# EAGLE board SideShield (EAGLE 5.11)
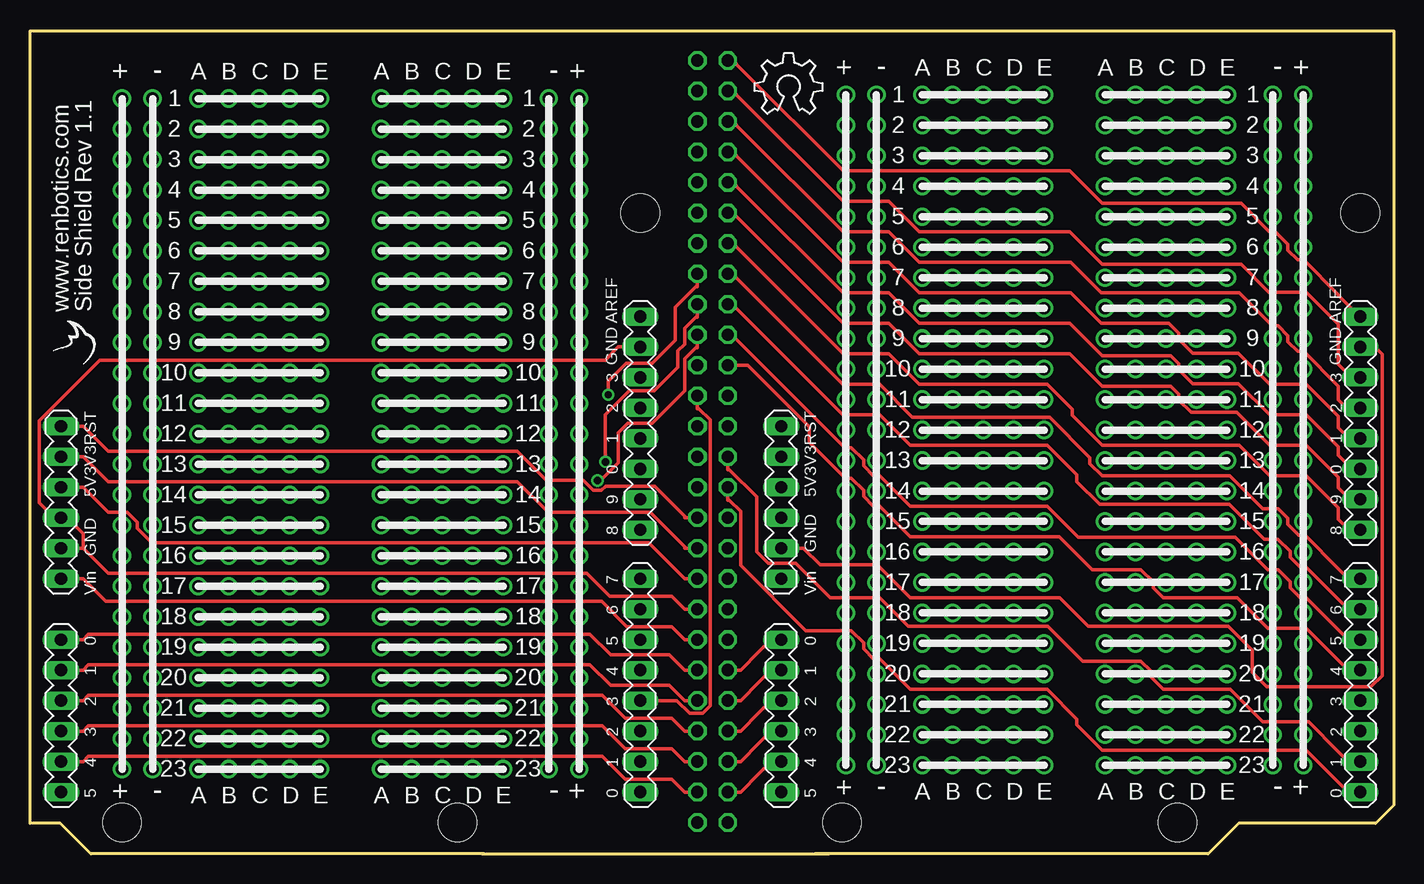
[diagram p0: board, top side]
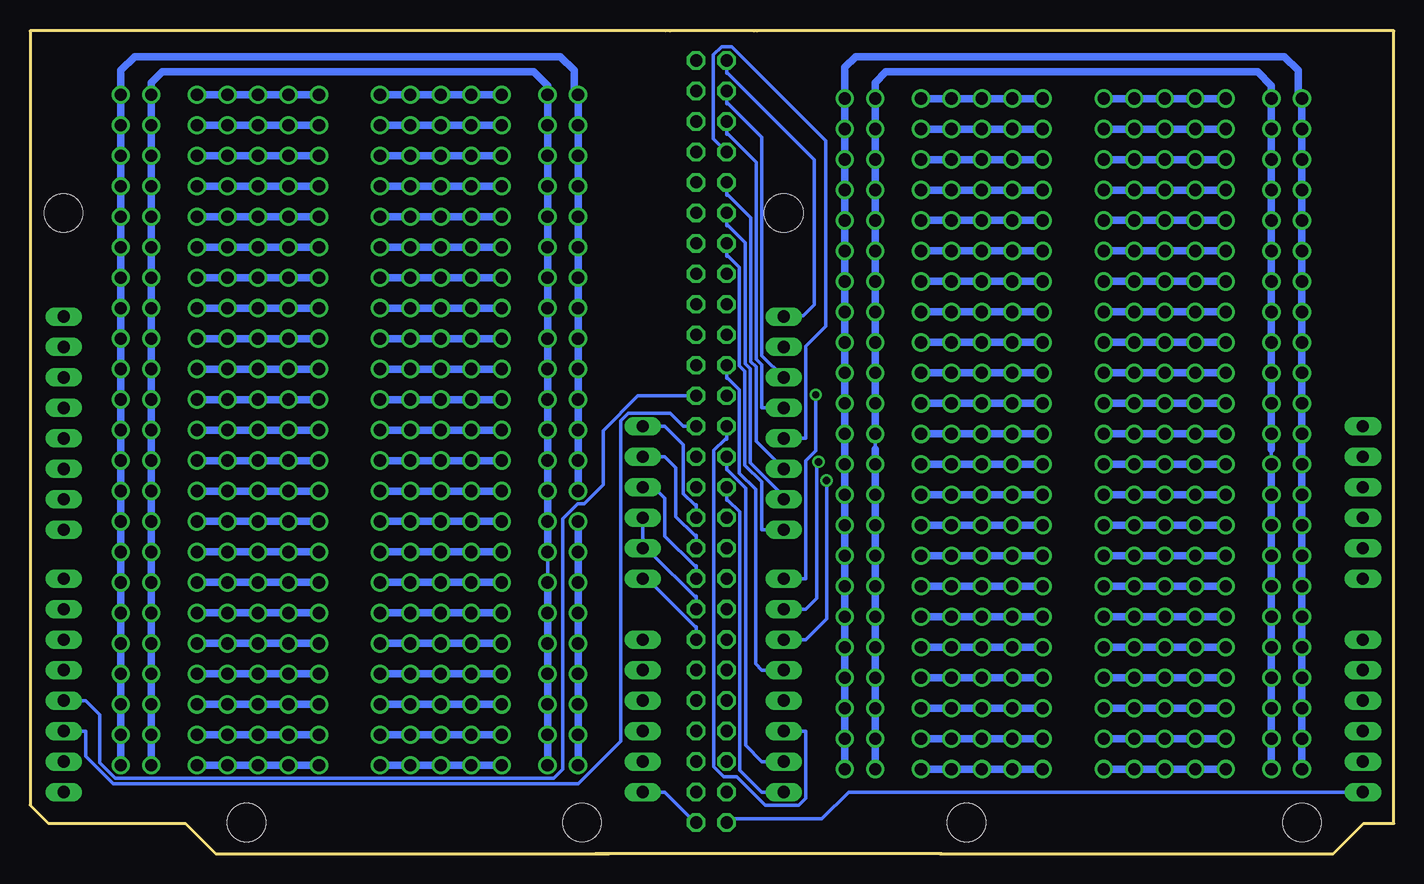
[diagram p1: board, bottom side, seen from below]

Size 113.66 x 68.66 mm. Coordinates in mm from the lower left corner, seen from the top.
Outline: 47.03,68.66 0.05,68.66
Outline: 37.85,0 37.67,0
Outline: 37.67,0 5.08,0 2.54,2.54 0,2.54 0,68.58 53.07,68.58
Outline: 53.07,68.58 53.34,68.58
Outline: 107.36,68.66 60.69,68.58
Outline: 60.69,68.58 60.38,68.66
Outline: 66.57,0 98.17,0 100.71,2.54 112.14,2.54 113.67,4.06 113.67,68.58 60.69,68.58
Outline: 66.57,0 65.41,0
Outline: 60.33,68.58 60.69,68.58
Outline: 37.67,0 66.57,0
Outline: 53.07,68.58 60.69,68.58
Copper layers (1*16): Top 0.035mm / dielectric 1.5mm / Bottom 0.035mm
Design rules "default *": minimum track width 10mil, minimum drill 24mil, track to track 10mil, track to pad 10mil, pad to pad 10mil, via to via 10mil, smd to smd 10mil, copper to edge 40mil, drill to drill 10mil, minimum pad ring 10mil, minimum via ring 8mil, stop-mask expansion 4mil, vias tented up to drill 0mil, thermal gap 10mil
Net classes: 0 default: width 0.254 mm, drill 0.305 mm, clearance 0.152 mm; 1 power: width 0.61 mm, drill 0.508 mm, clearance 0.152 mm
Holes 3.2 mm at 7.67,2.62 35.61,2.62 67.68,2.62 95.62,2.62 110.86,53.42 50.85,53.42

## Footprints (pad centres in the part's own frame; a part is rotated, then mirrored left to right if it is on the bottom)
MA06-1 = drill 1.016 long: 1 -6.35,0; 2 -3.81,0; 3 -1.27,0; 4 1.27,0; 5 3.81,0; 6 6.35,0
MA06-2 = drill 1.016 octagon: 1 -6.35,-1.27; 2 -6.35,1.27; 3 -3.81,-1.27; 4 -3.81,1.27; 5 -1.27,-1.27; 6 -1.27,1.27; 7 1.27,-1.27; 8 1.27,1.27; 9 3.81,-1.27; 10 3.81,1.27; 11 6.35,-1.27; 12 6.35,1.27
MA08-1 = drill 1.016 long: 1 -8.89,0; 2 -6.35,0; 3 -3.81,0; 4 -1.27,0; 5 1.27,0; 6 3.81,0; 7 6.35,0; 8 8.89,0
MA07-2 = drill 1.016 octagon: 1 -7.62,-1.27; 2 -7.62,1.27; 3 -5.08,-1.27; 4 -5.08,1.27; 5 -2.54,-1.27; 6 -2.54,1.27; 7 0,-1.27; 8 0,1.27; 9 2.54,-1.27; 10 2.54,1.27; 11 5.08,-1.27; 12 5.08,1.27; 13 7.62,-1.27; 14 7.62,1.27
MA08-2 = drill 1.016 octagon: 1 -8.89,-1.27; 2 -8.89,1.27; 3 -6.35,-1.27; 4 -6.35,1.27; 5 -3.81,-1.27; 6 -3.81,1.27; 7 -1.27,-1.27; 8 -1.27,1.27; 9 1.27,-1.27; 10 1.27,1.27; 11 3.81,-1.27; 12 3.81,1.27; 13 6.35,-1.27; 14 6.35,1.27; 15 8.89,-1.27; 16 8.89,1.27
MA09-1 = drill 1.016 round: 1 -10.16,0; 2 -7.62,0; 3 -5.08,0; 4 -2.54,0; 5 0,0; 6 2.54,0; 7 5.08,0; 8 7.62,0; 9 10.16,0
MA05-1 = drill 1.016 round: 1 -5.08,0; 2 -2.54,0; 3 0,0; 4 2.54,0; 5 5.08,0
MA05-2 = drill 1.016 octagon: 1 -5.08,-1.27; 2 -5.08,1.27; 3 -2.54,-1.27; 4 -2.54,1.27; 5 0,-1.27; 6 0,1.27; 7 2.54,-1.27; 8 2.54,1.27; 9 5.08,-1.27; 10 5.08,1.27

## Placement (x,y rotation side)
ANALOG1  [MA06-1]  2.59,11.51 270 top
ANALOG2  [MA06-1]  62.6,11.51 270 top
ANALOGJMP  [MA06-2]  56.88,8.97 270 top
DIGITALHIGH1  [MA08-1]  50.85,35.89 270 top
DIGITALHIGH2  [MA08-1]  110.86,14.05 270 top
DIGITALHIGHJMP  [MA07-2]  56.88,58.5 270 top
DIGITALLOW1  [MA08-1]  50.85,14.05 270 top
DIGITALLOW2  [MA08-1]  110.86,35.89 270 top
DIGITALLOWJMP  [MA08-2]  56.88,39.45 270 top
E$1  [OSHW_6X200_NOTEXT]  60.38,61.67 0 top
E$2  [LOGO]  5.45,40.72 90 top
J1  [MA09-1]  14.02,52.78 90 top
J2  [MA09-1]  16.56,52.78 90 top
J3  [MA09-1]  19.1,52.78 90 top
J4  [MA09-1]  21.64,52.78 90 top
J5  [MA09-1]  24.18,52.78 90 top
J6  [MA09-1]  29.26,52.78 90 top
J7  [MA09-1]  45.77,52.78 90 top
J8  [MA09-1]  7.67,52.78 90 top
J9  [MA09-1]  31.8,52.78 90 top
J10  [MA09-1]  34.34,52.78 90 top
J11  [MA09-1]  36.88,52.78 90 top
J12  [MA09-1]  39.42,52.78 90 top
J13  [MA09-1]  43.23,52.78 90 top
J14  [MA09-1]  10.21,52.78 90 top
J15  [MA09-1]  99.75,17.54 270 top
J16  [MA05-1]  99.75,35.32 270 top
J17  [MA09-1]  97.21,17.54 270 top
J18  [MA05-1]  97.21,35.32 270 top
J19  [MA09-1]  94.67,17.54 270 top
J20  [MA09-1]  39.42,17.22 270 top
J21  [MA09-1]  36.88,17.22 270 top
J22  [MA09-1]  34.34,17.22 270 top
J23  [MA09-1]  31.8,17.22 270 top
J24  [MA09-1]  29.26,17.22 270 top
J25  [MA09-1]  43.23,17.22 270 top
J26  [MA09-1]  10.21,17.22 270 top
J27  [MA05-1]  39.42,35 270 top
J28  [MA05-1]  36.88,35 270 top
J29  [MA05-1]  34.34,35 270 top
J30  [MA05-1]  31.8,35 270 top
J31  [MA05-1]  29.26,35 270 top
J32  [MA05-1]  43.23,35 270 top
J33  [MA05-1]  10.21,35 270 top
J34  [MA09-1]  24.18,17.22 270 top
J35  [MA09-1]  21.64,17.22 270 top
J36  [MA09-1]  19.1,17.22 270 top
J37  [MA09-1]  16.56,17.22 270 top
J38  [MA09-1]  14.02,17.22 270 top
J39  [MA09-1]  45.77,17.22 270 top
J40  [MA09-1]  7.67,17.22 270 top
J41  [MA05-1]  21.64,35 270 top
J42  [MA05-1]  24.18,35 270 top
J43  [MA05-1]  19.1,35 270 top
J44  [MA05-1]  16.56,35 270 top
J45  [MA05-1]  14.02,35 270 top
J46  [MA05-1]  45.77,35 270 top
J47  [MA05-1]  7.67,35 270 top
J48  [MA05-1]  94.67,35.32 270 top
J49  [MA09-1]  92.13,17.54 270 top
J50  [MA05-1]  92.13,35.32 270 top
J51  [MA09-1]  89.59,17.54 270 top
J52  [MA05-1]  89.59,35.32 270 top
J53  [MA09-1]  84.51,17.54 270 top
J54  [MA05-1]  81.97,35.32 270 top
J55  [MA09-1]  81.97,17.54 270 top
J56  [MA05-1]  84.51,35.32 270 top
J57  [MA09-1]  79.43,17.54 270 top
J58  [MA05-1]  79.43,35.32 270 top
J59  [MA09-1]  76.89,17.54 270 top
J60  [MA05-1]  76.89,35.32 270 top
J61  [MA09-1]  74.35,17.54 270 top
J62  [MA05-1]  74.35,35.32 270 top
J63  [MA09-1]  70.54,17.54 270 top
J64  [MA05-1]  70.54,35.32 270 top
J65  [MA09-1]  68,17.54 270 top
J66  [MA05-1]  68,35.32 270 top
J67  [MA09-1]  103.56,17.54 270 top
J68  [MA05-1]  103.56,35.32 270 top
J69  [MA09-1]  106.1,17.54 270 top
J70  [MA05-1]  106.1,35.32 270 top
J71  [MA09-1]  74.35,53.1 90 top
J72  [MA09-1]  76.89,53.1 90 top
J73  [MA09-1]  79.43,53.1 90 top
J74  [MA09-1]  81.97,53.1 90 top
J75  [MA09-1]  84.51,53.1 90 top
J76  [MA09-1]  106.1,53.1 90 top
J77  [MA09-1]  68,53.1 90 top
J78  [MA09-1]  89.59,53.1 90 top
J79  [MA09-1]  92.13,53.1 90 top
J80  [MA09-1]  94.67,53.1 90 top
J81  [MA09-1]  97.21,53.1 90 top
J82  [MA09-1]  99.75,53.1 90 top
J83  [MA09-1]  103.56,53.1 90 top
J84  [MA09-1]  70.54,53.1 90 top
POWER1  [MA06-1]  2.59,29.29 270 top
POWER2  [MA06-1]  62.6,29.29 270 top
POWERJMP  [MA05-2]  56.88,22.94 270 top

## Library data of the parts
ANALOG1 ANALOG2 ANALOGJMP DIGITALHIGH1 DIGITALHIGH2 DIGITALHIGHJMP DIGITALLOW1 DIGITALLOW2 DIGITALLOWJMP J1-J84 POWER1 POWER2 POWERJMP = con-lstb
E$1 = Logo 2
E$2 = renbotics

## Nets
3V31: POWER1.2 POWERJMP.3
3V32: POWER2.2 POWERJMP.4
AN10: ANALOG1.6 ANALOGJMP.11
AN11: ANALOG1.5 ANALOGJMP.9
AN12: ANALOG1.4 ANALOGJMP.7
AN13: ANALOG1.3 ANALOGJMP.5
AN14: ANALOG1.2 ANALOGJMP.3
AN15: ANALOG1.1 ANALOGJMP.1
AN20: ANALOG2.6 ANALOGJMP.12
AN21: ANALOG2.5 ANALOGJMP.10
AN22: ANALOG2.4 ANALOGJMP.8
AN23: ANALOG2.3 ANALOGJMP.6
AN24: ANALOG2.2 ANALOGJMP.4
AN25: ANALOG2.1 ANALOGJMP.2
AREF1: DIGITALHIGH1.1 DIGITALHIGHJMP.1
AREF2: DIGITALHIGHJMP.2 DIGITALLOW2.1
DL10: DIGITALLOW1.8 DIGITALLOWJMP.15
DL11: DIGITALLOW1.7 DIGITALLOWJMP.13
DL12: DIGITALLOW1.6 DIGITALLOWJMP.11
DL13: DIGITALLOW1.5 DIGITALLOWJMP.9
DL14: DIGITALLOW1.4 DIGITALLOWJMP.7
DL15: DIGITALLOW1.3 DIGITALLOWJMP.5
DL16: DIGITALLOW1.2 DIGITALLOWJMP.3
DL17: DIGITALLOW1.1 DIGITALLOWJMP.1
DL18: DIGITALHIGH1.8 DIGITALHIGHJMP.13
DL19: DIGITALHIGH1.7 DIGITALHIGHJMP.11
DL20: DIGITALHIGH2.8 DIGITALLOWJMP.16
DL21: DIGITALHIGH2.7 DIGITALLOWJMP.14
DL22: DIGITALHIGH2.6 DIGITALLOWJMP.12
DL23: DIGITALHIGH2.5 DIGITALLOWJMP.10
DL24: DIGITALHIGH2.4 DIGITALLOWJMP.8
DL25: DIGITALHIGH2.3 DIGITALLOWJMP.6
DL26: DIGITALHIGH2.2 DIGITALLOWJMP.4
DL27: DIGITALHIGH2.1 DIGITALLOWJMP.2
DL28: DIGITALHIGHJMP.14 DIGITALLOW2.8
DL29: DIGITALHIGHJMP.12 DIGITALLOW2.7
DL110: DIGITALHIGH1.6 DIGITALHIGHJMP.9
DL111: DIGITALHIGH1.5 DIGITALHIGHJMP.7
DL112: DIGITALHIGH1.4 DIGITALHIGHJMP.5
DL113: DIGITALHIGH1.3 DIGITALHIGHJMP.3
DL210: DIGITALHIGHJMP.10 DIGITALLOW2.6
DL211: DIGITALHIGHJMP.8 DIGITALLOW2.5
DL212: DIGITALHIGHJMP.6 DIGITALLOW2.4
DL213: DIGITALHIGHJMP.4 DIGITALLOW2.3
GND: J13.1 J13.2 J13.3 J13.4 J13.5 J13.6 J13.7 J13.8 J13.9 J14.1 J14.2 J14.3 J14.4 J14.5 J14.6 J14.7 J14.8 J14.9 J25.1 J25.2 J25.3 J25.4 J25.5 J25.6 J25.7 J25.8 J25.9 J26.1 J26.2 J26.3 J26.4 J26.5 J26.6 J26.7 J26.8 J26.9 J32.1 J32.2 J32.3 J32.4 J32.5 J33.1 J33.2 J33.3 J33.4 J33.5
GND1: DIGITALHIGH1.2 POWER1.4 POWER1.5 POWERJMP.7
GND2: DIGITALLOW2.2 POWER2.4 POWER2.5 POWERJMP.8
GND3: J63.1 J63.2 J63.3 J63.4 J63.5 J63.6 J63.7 J63.8 J63.9 J64.1 J64.2 J64.3 J64.4 J64.5 J67.1 J67.2 J67.3 J67.4 J67.5 J67.6 J67.7 J67.8 J67.9 J68.1 J68.2 J68.3 J68.4 J68.5 J83.1 J83.2 J83.3 J83.4 J83.5 J83.6 J83.7 J83.8 J83.9 J84.1 J84.2 J84.3 J84.4 J84.5 J84.6 J84.7 J84.8 J84.9
N$1: J20.1 J21.1 J22.1 J23.1 J24.1
N$2: J20.2 J21.2 J22.2 J23.2 J24.2
N$3: J20.3 J21.3 J22.3 J23.3 J24.3
N$4: J20.4 J21.4 J22.4 J23.4 J24.4
N$5: J20.5 J21.5 J22.5 J23.5 J24.5
N$6: J20.6 J21.6 J22.6 J23.6 J24.6
N$7: J20.7 J21.7 J22.7 J23.7 J24.7
N$8: J20.8 J21.8 J22.8 J23.8 J24.8
N$9: J20.9 J21.9 J22.9 J23.9 J24.9
N$10: J27.5 J28.5 J29.5 J30.5 J31.5
N$11: J27.4 J28.4 J29.4 J30.4 J31.4
N$12: J27.3 J28.3 J29.3 J30.3 J31.3
N$13: J27.2 J28.2 J29.2 J30.2 J31.2
N$14: J27.1 J28.1 J29.1 J30.1 J31.1
N$15: J15.1 J17.1 J19.1 J49.1 J51.1
N$16: J15.2 J17.2 J19.2 J49.2 J51.2
N$17: J1.1 J2.1 J3.1 J4.1 J5.1
N$18: J15.3 J17.3 J19.3 J49.3 J51.3
N$19: J34.9 J35.9 J36.9 J37.9 J38.9
N$20: J34.8 J35.8 J36.8 J37.8 J38.8
N$21: J34.7 J35.7 J36.7 J37.7 J38.7
N$22: J34.6 J35.6 J36.6 J37.6 J38.6
N$23: J34.5 J35.5 J36.5 J37.5 J38.5
N$24: J34.4 J35.4 J36.4 J37.4 J38.4
N$25: J34.3 J35.3 J36.3 J37.3 J38.3
N$26: J34.2 J35.2 J36.2 J37.2 J38.2
N$27: J34.1 J35.1 J36.1 J37.1 J38.1
N$28: J41.5 J42.5 J43.5 J44.5 J45.5
N$29: J41.4 J42.4 J43.4 J44.4 J45.4
N$30: J41.3 J42.3 J43.3 J44.3 J45.3
N$31: J41.2 J42.2 J43.2 J44.2 J45.2
N$32: J41.1 J42.1 J43.1 J44.1 J45.1
N$33: J15.4 J17.4 J19.4 J49.4 J51.4
N$34: J1.2 J2.2 J3.2 J4.2 J5.2
N$35: J1.3 J2.3 J3.3 J4.3 J5.3
N$36: J1.4 J2.4 J3.4 J4.4 J5.4
N$37: J1.5 J2.5 J3.5 J4.5 J5.5
N$38: J1.6 J2.6 J3.6 J4.6 J5.6
N$39: J1.7 J2.7 J3.7 J4.7 J5.7
N$40: J1.8 J2.8 J3.8 J4.8 J5.8
N$41: J1.9 J2.9 J3.9 J4.9 J5.9
N$42: J15.5 J17.5 J19.5 J49.5 J51.5
N$43: J6.1 J9.1 J10.1 J11.1 J12.1
N$44: J6.2 J9.2 J10.2 J11.2 J12.2
N$45: J6.3 J9.3 J10.3 J11.3 J12.3
N$46: J6.4 J9.4 J10.4 J11.4 J12.4
N$47: J6.5 J9.5 J10.5 J11.5 J12.5
N$48: J6.6 J9.6 J10.6 J11.6 J12.6
N$49: J6.7 J9.7 J10.7 J11.7 J12.7
N$50: J6.8 J9.8 J10.8 J11.8 J12.8
N$51: J6.9 J9.9 J10.9 J11.9 J12.9
N$52: J15.6 J17.6 J19.6 J49.6 J51.6
N$53: J15.7 J17.7 J19.7 J49.7 J51.7
N$54: J15.8 J17.8 J19.8 J49.8 J51.8
N$55: J15.9 J17.9 J19.9 J49.9 J51.9
N$56: J16.5 J18.5 J48.5 J50.5 J52.5
N$57: J16.4 J18.4 J48.4 J50.4 J52.4
N$58: J16.3 J18.3 J48.3 J50.3 J52.3
N$59: J16.2 J18.2 J48.2 J50.2 J52.2
N$60: J16.1 J18.1 J48.1 J50.1 J52.1
N$61: J53.9 J55.9 J57.9 J59.9 J61.9
N$62: J53.8 J55.8 J57.8 J59.8 J61.8
N$63: J53.7 J55.7 J57.7 J59.7 J61.7
N$64: J53.6 J55.6 J57.6 J59.6 J61.6
N$65: J53.5 J55.5 J57.5 J59.5 J61.5
N$66: J53.4 J55.4 J57.4 J59.4 J61.4
N$67: J53.3 J55.3 J57.3 J59.3 J61.3
N$68: J53.2 J55.2 J57.2 J59.2 J61.2
N$69: J53.1 J55.1 J57.1 J59.1 J61.1
N$70: J54.5 J56.5 J58.5 J60.5 J62.5
N$71: J54.4 J56.4 J58.4 J60.4 J62.4
N$72: J54.3 J56.3 J58.3 J60.3 J62.3
N$73: J54.2 J56.2 J58.2 J60.2 J62.2
N$74: J54.1 J56.1 J58.1 J60.1 J62.1
N$75: J71.1 J72.1 J73.1 J74.1 J75.1
N$76: J71.2 J72.2 J73.2 J74.2 J75.2
N$77: J71.3 J72.3 J73.3 J74.3 J75.3
N$78: J71.4 J72.4 J73.4 J74.4 J75.4
N$79: J71.5 J72.5 J73.5 J74.5 J75.5
N$80: J71.6 J72.6 J73.6 J74.6 J75.6
N$81: J71.7 J72.7 J73.7 J74.7 J75.7
N$82: J71.8 J72.8 J73.8 J74.8 J75.8
N$83: J71.9 J72.9 J73.9 J74.9 J75.9
N$84: J78.1 J79.1 J80.1 J81.1 J82.1
N$85: J78.2 J79.2 J80.2 J81.2 J82.2
N$86: J78.3 J79.3 J80.3 J81.3 J82.3
N$87: J78.4 J79.4 J80.4 J81.4 J82.4
N$88: J78.5 J79.5 J80.5 J81.5 J82.5
N$89: J78.6 J79.6 J80.6 J81.6 J82.6
N$90: J78.7 J79.7 J80.7 J81.7 J82.7
N$91: J78.8 J79.8 J80.8 J81.8 J82.8
N$92: J78.9 J79.9 J80.9 J81.9 J82.9
RST1: POWER1.1 POWERJMP.1
RST2: POWER2.1 POWERJMP.2
VCC: J7.1 J7.2 J7.3 J7.4 J7.5 J7.6 J7.7 J7.8 J7.9 J8.1 J8.2 J8.3 J8.4 J8.5 J8.6 J8.7 J8.8 J8.9 J39.1 J39.2 J39.3 J39.4 J39.5 J39.6 J39.7 J39.8 J39.9 J40.1 J40.2 J40.3 J40.4 J40.5 J40.6 J40.7 J40.8 J40.9 J46.1 J46.2 J46.3 J46.4 J46.5 J47.1 J47.2 J47.3 J47.4 J47.5
VCC1: POWER1.3 POWERJMP.5
VCC2: POWER2.3 POWERJMP.6
VCC3: J65.1 J65.2 J65.3 J65.4 J65.5 J65.6 J65.7 J65.8 J65.9 J66.1 J66.2 J66.3 J66.4 J66.5 J69.1 J69.2 J69.3 J69.4 J69.5 J69.6 J69.7 J69.8 J69.9 J70.1 J70.2 J70.3 J70.4 J70.5 J76.1 J76.2 J76.3 J76.4 J76.5 J76.6 J76.7 J76.8 J76.9 J77.1 J77.2 J77.3 J77.4 J77.5 J77.6 J77.7 J77.8 J77.9
VIN1: POWER1.6 POWERJMP.9
VIN2: POWER2.6 POWERJMP.10

## Tracks (layer width: path | path; a pad name or v marks a point on that pad's centre or on a via)
3V31
  Top 0.305: POWER1.2 4.42,33.1 6.5,31.01 40.61,31.01 43.17,28.45 51.71,28.45 54.55,25.61 54.55,25.48 POWERJMP.3
3V32
  Bottom 0.305: POWER2.2 60.77,33.1 59.83,32.16 59.83,28.09 58.29,26.54 58.15,26.54 POWERJMP.4
AN10
  Bottom 0.305: ANALOG1.6 45.45,5.16 47.68,2.93 55.3,2.93 ANALOGJMP.11
AN11
  Top 0.305: ANALOG1.5 4.42,7.7 4.86,8.14 47.67,8.14 49.59,6.22 53.48,6.22 54.55,5.16 ANALOGJMP.9
AN12
  Top 0.305: ANALOG1.4 4.42,10.24 4.86,10.68 47.67,10.68 49.59,8.76 53.48,8.76 54.55,7.7 ANALOGJMP.7
AN13
  Top 0.305: ANALOG1.3 4.42,12.78 4.86,13.22 47.67,13.22 49.59,11.3 53.48,11.3 54.55,10.24 ANALOGJMP.5
AN14
  Top 0.305: ANALOGJMP.3 54.55,12.78 53.28,14.05 48.38,14.05 46.67,15.76 4.86,15.76 4.42,15.32 ANALOG1.2
AN15
  Top 0.305: ANALOGJMP.1 54.55,15.32 53.28,16.59 48.38,16.59 46.67,18.3 4.86,18.3 4.42,17.86 ANALOG1.1
AN20
  Bottom 0.305: ANALOG2.6 60.77,5.16 59.22,3.61 58.23,2.62 ANALOGJMP.12
AN21
  Top 0.305: ANALOGJMP.10 59.22,5.16 60.77,6.71 61.76,7.7 ANALOG2.5
AN22
  Top 0.305: ANALOGJMP.8 59.22,7.7 60.77,9.25 61.76,10.24 ANALOG2.4
AN23
  Top 0.305: ANALOGJMP.6 59.22,10.24 60.77,11.79 61.76,12.78 ANALOG2.3
AN24
  Top 0.305: ANALOGJMP.4 59.22,12.78 60.77,14.33 61.76,15.32 ANALOG2.2
AN25
  Top 0.305: ANALOGJMP.2 59.22,15.32 60.77,16.87 61.76,17.86 ANALOG2.1
AREF1
  Bottom 0.254: 50.85,44.84 DIGITALHIGH1.1
  Bottom 0.305: DIGITALHIGHJMP.1 55.61,65.05 55.52,65.05 50.85,60.38 48.31,57.84 48.31,45.74 49.21,44.84 50.85,44.84
AREF2
  Top 0.305: DIGITALLOW2.1 110.82,44.78 109.03,46.57 109.03,46.61 106.15,49.49 105.64,49.49 104.83,50.31 104.83,50.8 103.73,51.9 103.24,51.9 100.92,54.21 89.34,54.21 86.64,56.91 67.75,56.91 59.22,65.44 58.54,66.12 DIGITALHIGHJMP.2
DL10
  Bottom 0.305: DIGITALLOWJMP.15 55.61,29.49 55.5,29.49 54.51,28.5 54.51,6.99 52.68,5.16 DIGITALLOW1.8
DL11
  Bottom 0.305: DIGITALLOW1.7 52.68,7.7 54.02,9.04 54.02,30.47 55.58,32.03 55.61,32.03 DIGITALLOWJMP.13
DL12
  Bottom 0.305: DIGITALLOW1.6 49.02,10.24 49.02,4.64 49.62,4.05 52.4,4.05 54.78,6.43 55.86,6.43 56.68,7.24 56.68,33.64 55.75,34.57 55.61,34.57 DIGITALLOWJMP.11
DL13
  Top 0.305: DIGITALLOWJMP.9 55.61,37.11 55.75,37.11 56.7,36.16 56.7,12.34 56.07,11.71 54.97,11.71 53.9,12.78 DIGITALLOW1.5
DL14
  Bottom 0.305: DIGITALLOWJMP.7 55.61,39.65 55.5,39.65 54.55,38.69 54.55,31.72 53.2,30.38 53.2,15.84 52.68,15.32 DIGITALLOW1.4
DL15  (via drill 0.61 pad 1.02)
  Top 0.305: DIGITALLOWJMP.5 55.61,42.19 55.49,42.19 54.55,41.24 54.55,38.57 51.86,35.89 49.82,35.89 49.02,35.09 49.02,32.58 47.56,31.12 v47.29,31.12
  Bottom 0.305: DIGITALLOW1.3 49.02,17.86 47.29,19.59 v47.29,31.12
DL16  (via drill 0.61 pad 1.02)
  Top 0.305: v47.95,32.67 47.95,36.6 49.94,38.59 52.03,38.59 53.99,40.56 53.99,41.93 54.55,42.48 54.55,43.78 55.49,44.73 55.61,44.73 DIGITALLOWJMP.3
  Bottom 0.305: v47.95,32.67 48.1,32.52 48.1,21.32 49.02,20.4 DIGITALLOW1.2
DL17  (via drill 0.61 pad 1.02)
  Top 0.305: v48.19,38.26 48.19,39.39 49.7,40.89 51.85,40.89 53.78,42.82 53.78,45.57 55.48,47.27 55.61,47.27 DIGITALLOWJMP.1
  Bottom 0.305: 48.19,33.58 49.02,32.75 49.02,22.94 DIGITALLOW1.1 | 48.19,33.58 | 48.19,33.58 v48.19,38.26
DL18
  Bottom 0.305: DIGITALHIGH1.8 52.68,27 52.68,30.99 54.09,32.4 54.09,40.22 54.55,40.68 54.55,48.88 55.48,49.81 55.61,49.81 DIGITALHIGHJMP.13
DL19
  Bottom 0.305: DIGITALHIGH1.7 50.85,29.81 53.63,32.59 53.63,40.41 54.05,40.83 54.05,50.92 55.48,52.35 55.61,52.35 DIGITALHIGHJMP.11
DL20
  Top 0.305: DIGITALLOWJMP.16 58.15,29.49 58.26,29.49 59.22,28.53 59.22,24.03 64.65,18.61 68.45,18.61 69.47,17.59 69.47,17.09 70.29,16.27 70.8,16.27 73.34,13.73 84.76,13.73 87.25,11.24 87.25,10.74 89.34,8.65 106.37,8.65 109.03,5.99 109.86,5.16 DIGITALHIGH2.8
DL21
  Top 0.305: DIGITALLOWJMP.14 58.15,32.03 58.29,32.03 60.55,29.77 60.55,25.19 61.53,24.21 63.83,24.21 66.69,21.35 70.8,21.35 73.17,18.97 84.82,18.97 87.73,16.07 92.58,16.07 93.4,15.25 93.4,14.76 94.42,13.73 100.01,13.73 102.74,10.99 106.56,10.99 109.03,8.53 109.86,7.7 DIGITALHIGH2.7
DL22
  Bottom 0.305: DIGITALHIGH2.6 109.03,10.24 109.03,8.13 106.74,5.85 67.98,5.85 64.43,9.41 64.43,36.1 63.82,36.71 60.3,36.71 59.22,35.64 DIGITALLOWJMP.12
DL23
  Bottom 0.305: DIGITALHIGH2.5 109.03,12.78 107.84,11.58 107.84,7.59 106.56,6.31 70.03,6.31 69.27,7.07 69.27,27.94 68.04,29.17 67.48,29.17 65.91,30.75 65.91,35.27 63,38.18 DIGITALLOWJMP.10
DL24
  Top 0.305: DIGITALLOWJMP.8 59.82,40.72 64.94,35.59 64.94,34.29 67.92,31.31 68.45,31.31 69.47,30.29 69.47,29.79 70.29,28.97 70.8,28.97 73.34,26.43 85.76,26.43 88.51,23.69 92.58,23.69 93.6,22.67 93.6,22.17 94.42,21.35 100.61,21.35 103.15,18.81 106.37,18.81 109.03,16.15 109.86,15.32 DIGITALHIGH2.4
DL25
  Top 0.305: DIGITALLOWJMP.6 58.49,43.26 59.22,42.52 67.9,33.85 68.45,33.85 69.47,32.83 69.47,32.33 70.29,31.51 70.8,31.51 73.34,28.97 84.76,28.97 87.34,26.39 100.43,26.39 103.14,23.69 104.01,23.69 105.03,22.67 105.03,22.17 105.85,21.35 106.37,21.35 109.03,18.69 109.86,17.86 DIGITALHIGH2.3
DL26
  Top 0.305: DIGITALHIGH2.2 109.86,20.4 109.03,21.23 106.37,23.89 105.85,23.89 105.03,24.71 105.03,25.2 103.99,26.23 102.85,26.23 99.96,29.13 89.14,29.13 87.25,31.02 87.25,31.59 84.79,34.05 73.34,34.05 70.8,36.59 67.73,36.59 59.22,45.1 58.52,45.8 DIGITALLOWJMP.4
DL27
  Top 0.305: DIGITALLOWJMP.2 58.52,48.34 59.22,47.64 67.73,39.13 70.8,39.13 73.54,36.39 84.96,36.39 88.33,33.02 88.33,32.53 89.35,31.51 99.99,31.51 102.73,28.77 104.01,28.77 104.83,27.95 104.83,27.45 105.73,26.54 106.26,26.54 109.03,23.77 109.86,22.94 DIGITALHIGH2.1
DL28
  Top 0.305: DIGITALLOW2.8 109.92,27 109.03,27.89 109.03,28.83 106.35,31.51 103.3,31.51 100.76,34.05 89.34,34.05 86.84,36.54 86.84,37.04 84.75,39.13 74.09,39.13 71.55,41.67 67.75,41.67 59.22,50.2 58.54,50.88 DIGITALHIGHJMP.14
DL29
  Top 0.305: DIGITALLOW2.7 109.99,29.54 109.03,30.5 109.03,31.37 106.35,34.05 103.3,34.05 100.55,36.79 96.75,36.79 95.73,37.81 95.73,38.31 95.07,38.97 89.34,38.97 86.64,41.67 74.09,41.67 71.55,44.21 67.75,44.21 59.22,52.74 58.54,53.42 DIGITALHIGHJMP.12
DL110
  Bottom 0.305: DIGITALHIGHJMP.9 55.61,54.89 55.48,54.89 53.59,53 53.59,41.02 53.16,40.58 53.16,34.39 DIGITALHIGH1.6
DL111
  Bottom 0.254: 48.07,43.26
  Bottom 0.305: DIGITALHIGH1.5 49.02,34.62 49.02,42.3 48.07,43.26 47.36,43.97 47.36,51.19 47.36,59.44 49.02,61.1 55.17,67.25 56.03,67.25 56.71,66.57 56.71,59.59 DIGITALHIGHJMP.7
DL112
  Bottom 0.305: DIGITALHIGH1.4 52.68,37.16 52.68,40.76 53.14,41.21 53.14,57.63 55.48,59.97 55.61,59.97 DIGITALHIGHJMP.5
DL113
  Bottom 0.305: DIGITALHIGHJMP.3 55.61,62.51 55.48,62.51 52.68,59.71 52.68,41.53 DIGITALHIGH1.3
DL210
  Top 0.305: DIGITALLOW2.6 110.15,32.08 109.03,33.2 109.03,33.91 106.35,36.59 103.3,36.59 100.69,39.2 96.89,39.2 95.73,40.36 95.73,40.85 95.07,41.51 89.34,41.51 86.64,44.21 74.09,44.21 71.55,46.75 67.75,46.75 59.22,55.28 58.54,55.96 DIGITALHIGHJMP.10
DL211
  Top 0.305: DIGITALLOW2.5 109.92,34.62 109.03,35.52 109.03,36.45 106.35,39.13 103.3,39.13 100.69,41.74 96.89,41.74 95.73,42.9 95.73,43.39 94.91,44.21 89.27,44.21 86.73,46.75 74.09,46.75 71.55,49.29 67.75,49.29 59.22,57.82 58.54,58.5 DIGITALHIGHJMP.8
DL212
  Top 0.305: DIGITALLOW2.4 109.71,37.16 109.03,37.84 109.03,38.99 106.15,41.87 105.64,41.87 104.83,42.69 104.83,43.18 104,44.01 103.51,44.01 100.76,46.75 89.27,46.75 86.73,49.29 74.09,49.29 71.55,51.83 67.75,51.83 59.22,60.36 58.54,61.04 DIGITALHIGHJMP.6
DL213
  Top 0.305: DIGITALLOW2.3 110.15,39.7 109.03,40.82 109.03,44.12 106.34,46.82 103.24,46.82 100.92,49.13 89.34,49.13 86.64,51.83 74.09,51.83 71.55,54.37 67.75,54.37 59.22,62.9 58.54,63.58 DIGITALHIGHJMP.4
GND
  Bottom 0.305: J33.3 10.21,33.73 J33.4 | J32.3 43.23,33.73
  Bottom 0.61: 43.23,33.73 J32.4 J32.5 J25.1 J25.2 J25.3 J25.4 J25.5 J25.6 J25.7 J25.8 J25.9 | J14.9 J14.8 J14.7 J14.6 J14.5 J14.4 J14.3 J14.2 J14.1 J33.1 J33.2 J33.3 | J33.4 J33.5 J26.1 J26.2 J26.3 J26.4 J26.5 J26.6 J26.7 J26.8 J26.9 | J32.3 J32.2 J32.1 J13.1 J13.2 J13.3 J13.4 J13.5 J13.6 J13.7 J13.8 J13.9 43.23,64.27 42.33,65.16 11.36,65.16 10.21,64.02 10.21,33.73
GND1
  Top 0.305: POWERJMP.7 54.55,20.4 53.48,21.46 48.31,21.46 46.38,23.39 6.5,23.39 4.42,25.48 | POWER1.5 4.42,25.48 | 4.42,25.48 4.42,26.66 3.07,28.02 POWER1.4 2,28.02 0.76,29.25 0.76,36.11 5.8,41.15 47.93,41.15 49.02,42.24 DIGITALHIGH1.2
GND2
  Top 0.305: POWER2.5 64.46,25.48 65.84,24.09 70.59,24.09 73.34,21.35 85.81,21.35 88.18,18.97 99.84,18.97 101.85,16.96 101.85,15.14 103.08,13.92 111.74,13.92 112.69,14.86 112.69,41.62 112.07,42.24 DIGITALLOW2.2
  Bottom 0.305: POWERJMP.8 58.15,21.46 58.29,21.46 61.8,24.97 61.8,25.48 | 61.8,25.48 62.6,26.28 POWER2.4 | 61.8,25.48 POWER2.5
GND3
  Bottom 0.305: J63.3 J63.2
  Bottom 0.61: J67.9 J67.8 J67.7 J67.6 J67.5 J67.4 J67.3 J67.2 J67.1 J68.5 J68.4 J68.3 J68.2 J68.1 J83.1 J83.2 J83.3 J83.4 J83.5 J83.6 J83.7 J83.8 J83.9 103.56,64.27 102.66,65.16 71.68,65.16 70.54,64.02 J84.9 J84.8 J84.7 J84.6 J84.5 J84.4 J84.3 J84.2 J84.1 J64.1 J64.2 J64.3 J64.4 J64.5 J63.1 J63.2 | J63.3 J63.4 J63.5 J63.6 J63.7 J63.8 J63.9
N$1
  Bottom 0.61: J20.1 J21.1 J22.1 J23.1 J24.1
N$2
  Bottom 0.61: J20.2 J21.2 J22.2 J23.2 J24.2
N$3
  Bottom 0.61: J20.3 J21.3 J22.3 J23.3 J24.3
N$4
  Bottom 0.61: J20.4 J21.4 J22.4 J23.4 J24.4
N$5
  Bottom 0.61: J20.5 J21.5 J22.5 J23.5 J24.5
N$6
  Bottom 0.61: J20.6 J21.6 J22.6 J23.6 J24.6
N$7
  Bottom 0.61: J20.7 J21.7 J22.7 J23.7 J24.7
N$8
  Bottom 0.61: J20.8 J21.8 J22.8 J23.8 J24.8
N$9
  Bottom 0.61: J20.9 J21.9 J22.9 J23.9 J24.9
N$10
  Bottom 0.61: J27.5 J28.5 J29.5 J30.5 J31.5
N$11
  Bottom 0.61: J27.4 J28.4 J29.4 J30.4 J31.4
N$12
  Bottom 0.61: J27.3 J28.3 J29.3 J30.3 J31.3
N$13
  Bottom 0.61: J27.2 J28.2 J29.2 J30.2 J31.2
N$14
  Bottom 0.61: J27.1 J28.1 J29.1 J30.1 J31.1
N$15
  Bottom 0.61: J15.1 J17.1 J19.1 J49.1 J51.1
N$16
  Bottom 0.61: J15.2 J17.2 J19.2 J49.2 J51.2
N$17
  Bottom 0.61: J5.1 J4.1 J3.1 J2.1 J1.1
N$18
  Bottom 0.61: J15.3 J17.3 J19.3 J49.3 J51.3
N$19
  Bottom 0.61: J34.9 J35.9 J36.9 J37.9 J38.9
N$20
  Bottom 0.61: J34.8 J35.8 J36.8 J37.8 J38.8
N$21
  Bottom 0.61: J34.7 J35.7 J36.7 J37.7 J38.7
N$22
  Bottom 0.61: J34.6 J35.6 J36.6 J37.6 J38.6
N$23
  Bottom 0.61: J34.5 J35.5 J36.5 J37.5 J38.5
N$24
  Bottom 0.61: J34.4 J35.4 J36.4 J37.4 J38.4
N$25
  Bottom 0.61: J34.3 J35.3 J36.3 J37.3 J38.3
N$26
  Bottom 0.61: J34.2 J35.2 J36.2 J37.2 J38.2
N$27
  Bottom 0.61: J34.1 J35.1 J36.1 J37.1 J38.1
N$28
  Bottom 0.61: J42.5 J41.5 J43.5 J44.5 J45.5
N$29
  Bottom 0.61: J42.4 J41.4 J43.4 J44.4 J45.4
N$30
  Bottom 0.61: J42.3 J41.3 J43.3 J44.3 J45.3
N$31
  Bottom 0.61: J42.2 J41.2 J43.2 J44.2 J45.2
N$32
  Bottom 0.61: J42.1 J41.1 J43.1 J44.1 J45.1
N$33
  Bottom 0.61: J15.4 J17.4 J19.4 J49.4 J51.4
N$34
  Bottom 0.61: J5.2 J4.2 J3.2 J2.2 J1.2
N$35
  Bottom 0.61: J5.3 J4.3 J3.3 J2.3 J1.3
N$36
  Bottom 0.61: J5.4 J4.4 J3.4 J2.4 J1.4
N$37
  Bottom 0.61: J5.5 J4.5 J3.5 J2.5 J1.5
N$38
  Bottom 0.61: J5.6 J4.6 J3.6 J2.6 J1.6
N$39
  Bottom 0.61: J5.7 J4.7 J3.7 J2.7 J1.7
N$40
  Bottom 0.61: J5.8 J4.8 J3.8 J2.8 J1.8
N$41
  Bottom 0.61: J5.9 J4.9 J3.9 J2.9 J1.9
N$42
  Bottom 0.61: J15.5 J17.5 J19.5 J49.5 J51.5
N$43
  Bottom 0.61: J12.1 J11.1 J10.1 J9.1 J6.1
N$44
  Bottom 0.61: J12.2 J11.2 J10.2 J9.2 J6.2
N$45
  Bottom 0.61: J12.3 J11.3 J10.3 J9.3 J6.3
N$46
  Bottom 0.61: J12.4 J11.4 J10.4 J9.4 J6.4
N$47
  Bottom 0.61: J12.5 J11.5 J10.5 J9.5 J6.5
N$48
  Bottom 0.61: J12.6 J11.6 J10.6 J9.6 J6.6
N$49
  Bottom 0.61: J12.7 J11.7 J10.7 J9.7 J6.7
N$50
  Bottom 0.61: J12.8 J11.8 J10.8 J9.8 J6.8
N$51
  Bottom 0.61: J12.9 J11.9 J10.9 J9.9 J6.9
N$52
  Bottom 0.61: J15.6 J17.6 J19.6 J49.6 J51.6
N$53
  Bottom 0.61: J15.7 J17.7 J19.7 J49.7 J51.7
N$54
  Bottom 0.61: J15.8 J17.8 J19.8 J49.8 J51.8
N$55
  Bottom 0.61: J15.9 J17.9 J19.9 J49.9 J51.9
N$56
  Bottom 0.61: J16.5 J18.5 J48.5 J50.5 J52.5
N$57
  Bottom 0.61: J16.4 J18.4 J48.4 J50.4 J52.4
N$58
  Bottom 0.61: J16.3 J18.3 J48.3 J50.3 J52.3
N$59
  Bottom 0.61: J16.2 J18.2 J48.2 J50.2 J52.2
N$60
  Bottom 0.61: J16.1 J18.1 J48.1 J50.1 J52.1
N$61
  Bottom 0.61: J53.9 J55.9 J57.9 J59.9 J61.9
N$62
  Bottom 0.61: J53.8 J55.8 J57.8 J59.8 J61.8
N$63
  Bottom 0.61: J53.7 J55.7 J57.7 J59.7 J61.7
N$64
  Bottom 0.61: J53.6 J55.6 J57.6 J59.6 J61.6
N$65
  Bottom 0.61: J53.5 J55.5 J57.5 J59.5 J61.5
N$66
  Bottom 0.61: J53.4 J55.4 J57.4 J59.4 J61.4
N$67
  Bottom 0.61: J53.3 J55.3 J57.3 J59.3 J61.3
N$68
  Bottom 0.61: J53.2 J55.2 J57.2 J59.2 J61.2
N$69
  Bottom 0.61: J53.1 J55.1 J57.1 J59.1 J61.1
N$70
  Bottom 0.61: J56.5 J54.5 J58.5 J60.5 J62.5
N$71
  Bottom 0.61: J56.4 J54.4 J58.4 J60.4 J62.4
N$72
  Bottom 0.61: J56.3 J54.3 J58.3 J60.3 J62.3
N$73
  Bottom 0.61: J56.2 J54.2 J58.2 J60.2 J62.2
N$74
  Bottom 0.61: J56.1 J54.1 J58.1 J60.1 J62.1
N$75
  Bottom 0.61: J75.1 J74.1 J73.1 J72.1 J71.1
N$76
  Bottom 0.61: J75.2 J74.2 J73.2 J72.2 J71.2
N$77
  Bottom 0.61: J75.3 J74.3 J73.3 J72.3 J71.3
N$78
  Bottom 0.61: J75.4 J74.4 J73.4 J72.4 J71.4
N$79
  Bottom 0.61: J75.5 J74.5 J73.5 J72.5 J71.5
N$80
  Bottom 0.61: J75.6 J74.6 J73.6 J72.6 J71.6
N$81
  Bottom 0.61: J75.7 J74.7 J73.7 J72.7 J71.7
N$82
  Bottom 0.61: J75.8 J74.8 J73.8 J72.8 J71.8
N$83
  Bottom 0.61: J75.9 J74.9 J73.9 J72.9 J71.9
N$84
  Bottom 0.61: J82.1 J81.1 J80.1 J79.1 J78.1
N$85
  Bottom 0.61: J82.2 J81.2 J80.2 J79.2 J78.2
N$86
  Bottom 0.61: J82.3 J81.3 J80.3 J79.3 J78.3
N$87
  Bottom 0.61: J82.4 J81.4 J80.4 J79.4 J78.4
N$88
  Bottom 0.61: J82.5 J81.5 J80.5 J79.5 J78.5
N$89
  Bottom 0.61: J82.6 J81.6 J80.6 J79.6 J78.6
N$90
  Bottom 0.61: J82.7 J81.7 J80.7 J79.7 J78.7
N$91
  Bottom 0.61: J82.8 J81.8 J80.8 J79.8 J78.8
N$92
  Bottom 0.61: J82.9 J81.9 J80.9 J79.9 J78.9
RST1
  Top 0.305: POWER1.1 4.42,35.64 6.5,33.55 40.61,33.55 43.02,31.15 46.1,31.15 46.95,30.3 47.62,30.3 47.97,30.65 52.05,30.65 54.55,28.15 54.55,28.02 POWERJMP.1
RST2
  Bottom 0.305: POWER2.1 60.77,35.64 59.22,34.09 59.22,30.03 58.28,29.08 58.15,29.08 POWERJMP.2
VCC
  Bottom 0.61: J39.9 J39.8 J39.7 J39.6 J39.5 J39.4 J39.3 J39.2 J39.1 J46.5 J46.4 J46.3 J46.2 J46.1 J7.1 J7.2 J7.3 J7.4 J7.5 J7.6 J7.7 J7.8 J7.9 45.77,65.54 44.87,66.43 9.13,66.43 7.99,65.29 7.99,62.94 J8.9 J8.8 J8.7 J8.6 J8.5 J8.4 J8.3 J8.2 J8.1 J47.1 J47.2 J47.3 J47.4 J47.5 J40.1 J40.2 J40.3 J40.4 J40.5 J40.6 J40.7 J40.8 J40.9
VCC1
  Top 0.305: POWER1.3 4.42,30.56 6.5,28.47 8.1,28.47 8.94,27.63 8.94,27.13 10.16,25.91 51.57,25.91 54.55,22.94 POWERJMP.5
VCC2
  Bottom 0.305: POWERJMP.6 58.15,24 58.29,24 60.77,26.49 60.77,29.62 61.7,30.56 POWER2.3
VCC3
  Top 0.61: J65.1 J66.5
  Bottom 0.61: J69.9 J69.8 J69.7 J69.6 J69.5 J69.4 J69.3 J69.2 J69.1 J70.5 J70.4 J70.3 J70.2 J70.1 J76.1 J76.2 J76.3 J76.4 J76.5 J76.6 J76.7 J76.8 J76.9 106.1,65.29 104.95,66.43 69.46,66.43 68.31,65.29 68.31,63.26 J77.9 J77.8 J77.7 J77.6 J77.5 J77.4 J77.3 J77.2 J77.1 J66.1 J66.2 J66.3 J66.4 J66.5 | J65.1 J65.2 J65.3 J65.4 J65.5 J65.6 J65.7 J65.8 J65.9
VIN1
  Top 0.305: POWER1.6 4.42,22.94 6.32,21.03 47.63,21.03 49.74,18.92 53.48,18.92 54.55,17.86 POWERJMP.9
VIN2
  Bottom 0.305: POWERJMP.10 58.15,18.92 58.23,18.92 60.77,21.47 62.24,22.94 POWER2.6

## Text on the board
tNames: + | - | A | B | C | D | E | A | B | C | D | E | - | + | + | - | A | B | C | D | E | A | B | C | D | E | - | + | 1 | 1 | 1 | 1 | 2 | 2 | 2 | 2 | 3 | 3 | 3 | 3 | 4 | 4 | 4 | 4 | 5 | 5 | 5 | 5 | 6 | 6 | 6 | 6 | 7 | 7 | 7 | 7 | www.renbotics.com | Side Shield Rev 1.1 | 8 | 8 | 8 | 8 | AREF | AREF | 9 | 9 | 9 | 9 | GND | GND | 10 | 10 | 3 | 10 | 10 | 3 | 2 | 2 | RST | 11 | 11 | RST | 11 | 11 | 12 | 12 | 1 | 12 | 12 | 1 | 3V3 | 3V3 | 0 | 0 | 5V | 13 | 13 | 5V | 13 | 13 | 9 | 14 | 14 | 9 | 14 | 14 | GND | GND | 8 | 8 | 15 | 15 | 15 | 15 | 16 | 16 | Vin | 16 | 16 | Vin | 7 | 7 | 17 | 17 | 17 | 17 | 6 | 6 | 18 | 18 | 18 | 18 | 0 | 5 | 0 | 5 | 19 | 19 | 19 | 19 | 1 | 4 | 1 | 4 | 20 | 20 | 20 | 20 | 2 | 3 | 2 | 3 | 21 | 21 | 21 | 21 | 3 | 2 | 3 | 2 | 22 | 22 | 22 | 22 | 4 | 1 | 4 | 1 | 23 | 23 | 23 | 23 | 5 | 0 | 5 | 0 | + | - | - | + | + | - | A | B | C | D | E | A | B | C | D | E | - | + | A | B | C | D | E | A | B | C | D | E